# EAGLE board 10AxisFeatherWing (EAGLE 9.6.2)
REV: B
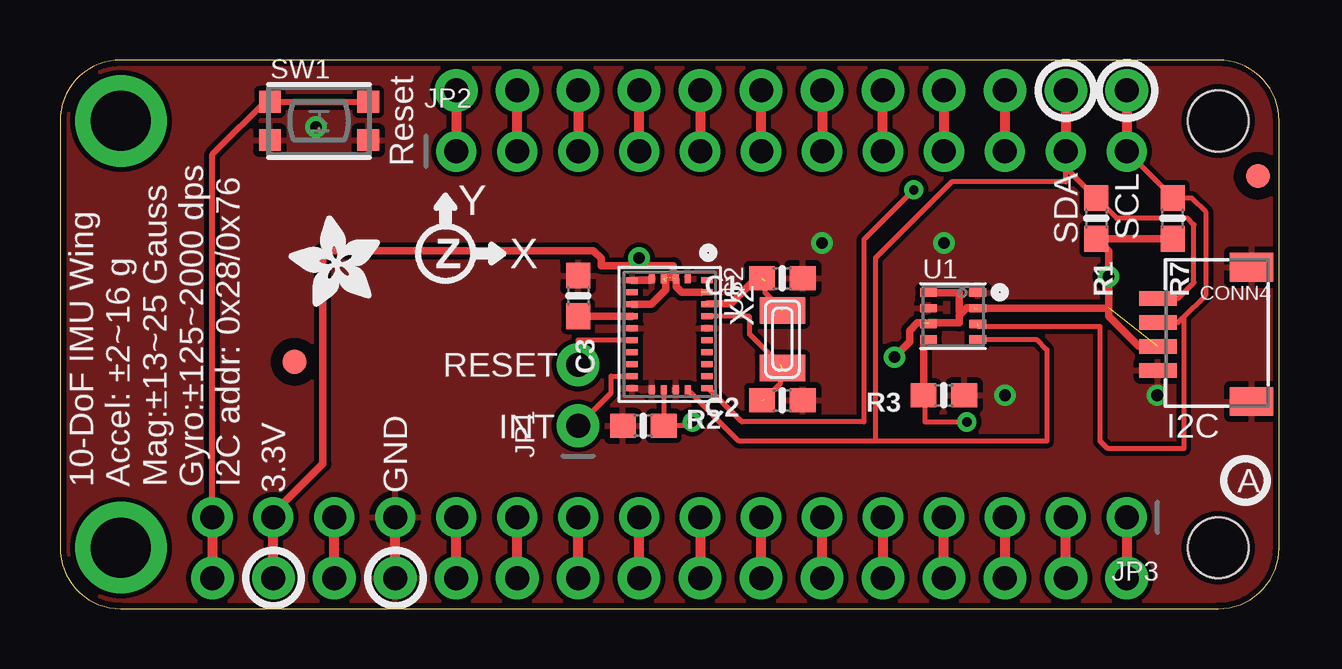
[diagram p0: board, top side]
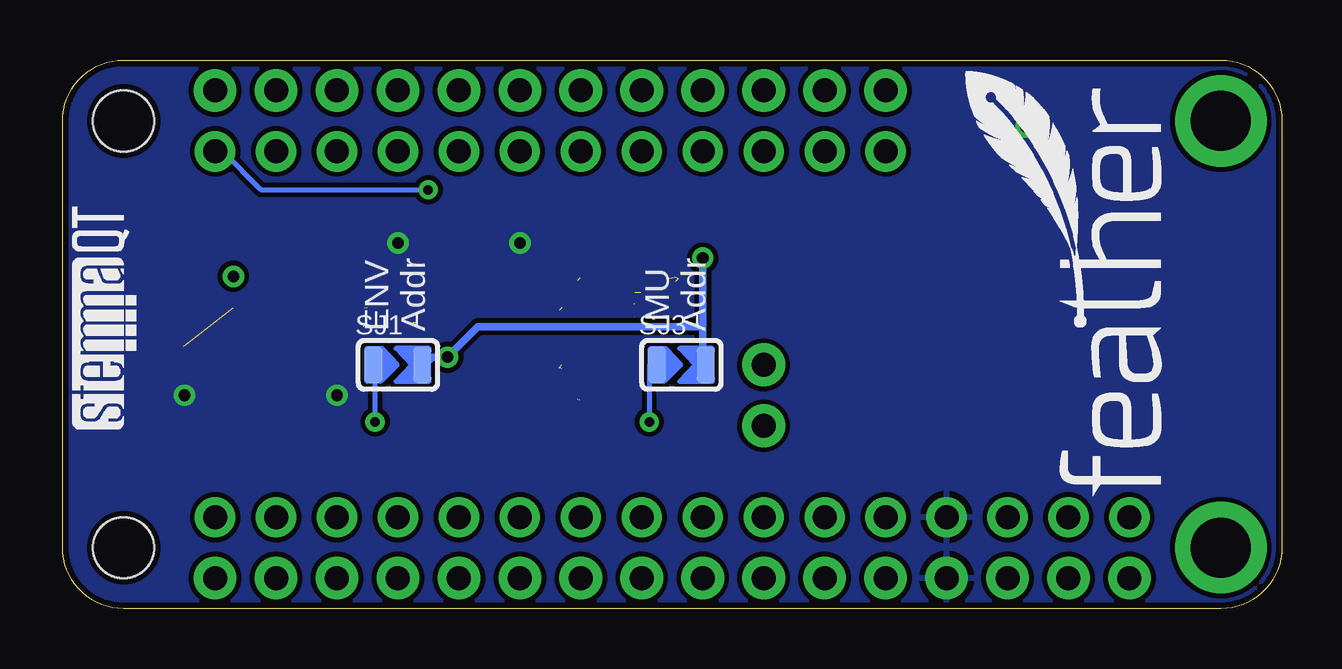
[diagram p1: board, bottom side, seen from below]

Size 50.8 x 22.86 mm. Coordinates in mm from the lower left corner, seen from the top.
Copper layers (1*16): Top 0.035mm / dielectric 1.5mm / Bottom 0.035mm
Design rules "adafruit *": minimum track width 8mil, minimum drill 15.5mil, track to track 8mil, track to pad 8mil, pad to pad 8mil, via to via 8mil, smd to smd 8mil, copper to edge 10mil, drill to drill 8mil, minimum pad ring 10mil, minimum via ring 8mil, stop-mask expansion 2mil, vias tented up to drill 20mil, thermal gap 10mil
Net classes: 1 highpower: width 0.406 mm, drill 0.483 mm; 2 lowpower: width 0.305 mm, drill 0.483 mm

## Footprints (pad centres in the part's own frame; a part is rotated, then mirrored left to right if it is on the bottom)
0603-NO = smd 1.075 x 1: 1 -0.85,0; 2 0.85,0
JST_SH4 = smd 0.6 x 1.55: 1 -1.5,2.514; 2 -0.5,2.514; 3 0.5,2.514; 4 1.5,2.514 | smd 1.2 x 1.8: MT1 -2.8,-1.386; MT2 2.8,-1.386
FIDUCIAL_1MM = smd 1 x 1: 1 0,0
1X02_ROUND = drill 1 pad 1.778: 1 -1.27,0; 2 1.27,0
1X12_ROUND = drill 1 pad 1.676: 1 -13.97,0; 2 -11.43,0; 3 -8.89,0; 4 -6.35,0; 5 -3.81,0; 6 -1.27,0; 7 1.27,0; 8 3.81,0; 9 6.35,0; 10 8.89,0; 11 11.43,0; 12 13.97,0
1X16_ROUND = drill 1 pad 1.676: 1 -19.05,0; 2 -16.51,0; 3 -13.97,0; 4 -11.43,0; 5 -8.89,0; 6 -6.35,0; 7 -3.81,0; 8 -1.27,0; 9 1.27,0; 10 3.81,0; 11 6.35,0; 12 8.89,0; 13 11.43,0; 14 13.97,0; 15 16.51,0; 16 19.05,0
FEATHERWING = drill 1 pad 1.778: 1 6.35,1.27; 2 8.89,1.27; 3 11.43,1.27; 4 13.97,1.27; 5 16.51,1.27; 6 19.05,1.27; 7 21.59,1.27; 8 24.13,1.27; 9 26.67,1.27; 10 29.21,1.27; 11 31.75,1.27; 12 34.29,1.27; 13 36.83,1.27; 14 39.37,1.27; 15 41.91,1.27; 16 44.45,1.27; 17 44.45,21.59; 18 41.91,21.59; 19 39.37,21.59; 20 36.83,21.59; 21 34.29,21.59; 22 31.75,21.59; 23 29.21,21.59; 24 26.67,21.59; 25 24.13,21.59; 26 21.59,21.59; 27 19.05,21.59; 28 16.51,21.59 | drill 2.5 pad 3.81: P$1 2.54,20.32; P$2 2.54,2.54 | hole 2.54: 48.26,20.32; 48.26,2.54
SOLDERJUMPER_ARROW_NOPASTE = smd 0.762 x 1.524: 1 -1.016,0; 2 1.016,0
BTN_KMR2_4.6X2.8 = smd 0.9 x 0.9: A 2.05,0.8; A' -2.05,0.8; B 2.05,-0.8; B' -2.05,-0.8
BME280 = smd 0.7 x 0.35: 1 1.025,0.975; 2 1.025,0.325; 3 1.025,-0.325; 4 1.025,-0.975; 5 -1.025,-0.975; 6 -1.025,-0.325; 7 -1.025,0.325; 8 -1.025,0.975
BNO055 = smd 0.25 x 0.475: 1 -2.25,1.562; 6 -2.25,-1.562; 7 -1.75,-1.562; 8 -1.25,-1.562; 9 -0.75,-1.562; 10 -0.25,-1.562; 11 0.25,-1.562; 12 0.75,-1.562; 13 1.25,-1.562; 14 1.75,-1.562; 15 2.25,-1.562; 20 2.25,1.562; 21 1.75,1.562; 22 1.25,1.562; 23 0.75,1.562; 24 0.25,1.562; 25 -0.25,1.562; 26 -0.75,1.562; 27 -1.25,1.562; 28 -1.75,1.562 | smd 0.375 x 0.25: 2 -2.312,0.75; 3 -2.312,0.25; 4 -2.312,-0.25; 5 -2.312,-0.75; 16 2.312,-0.75; 17 2.312,-0.25; 18 2.312,0.25; 19 2.312,0.75
XTAL3215 = smd 1.1 x 1.9: P$1 1.2,0; P$2 -1.2,0

## Placement (x,y rotation side)
C1  22pF  [0603-NO]  30.1,13.77 180 top
C2  22pF  [0603-NO]  30.1,8.69 180 top
C3  0.1uF  [0603-NO]  21.59,13.03 270 top
CONN4  STEMMA_I2C_QT  [JST_SH4]  48.26,11.43 90 top
FID1  FIDUCIAL_1MM  [FIDUCIAL_1MM]  9.78,10.29 0 top
FID2  FIDUCIAL_1MM  [FIDUCIAL_1MM]  49.91,18.03 0 top
JP1  [1X02_ROUND]  21.59,8.89 90 top
JP2  [1X12_ROUND]  30.48,19.05 0 top
JP3  [1X16_ROUND]  25.4,3.81 180 top
MS1  FEATHERWING  [FEATHERWING]  0,0 0 top
R1  10K  [0603-NO]  43.18,16.26 270 top
R2  10K  [0603-NO]  24.31,7.62 0 top
R3  10K  [0603-NO]  36.83,8.89 180 top
R7  10K  [0603-NO]  46.35,16.26 270 top
SJ1  [SOLDERJUMPER_ARROW_NOPASTE]  36.83,10.16 0 bottom
SJ3  [SOLDERJUMPER_ARROW_NOPASTE]  25.02,10.16 0 bottom
SW1  KMR2  [BTN_KMR2_4.6X2.8]  10.79,20.32 0 top
U1  BME280  [BME280]  37.21,12.19 0 top
U$2  BNO055  [BNO055]  25.4,11.43 270 top
U$13  [FEATHERLOGO_MED]  4.95,4.57 90 bottom
U$31  [STEMMAQT]  47.75,7.49 90 bottom
U$50  [ADAFRUIT_3.5MM]  13.34,12.57 90 top
U$51  [PCBFEAT-REV-040]  49.4,5.33 0 top
X2  32.768  [XTAL3215]  30.1,11.23 270 top

## Library data of the parts
C1-C3 CONN4 JP1-JP3 MS1 R1-R3 R7 SW1 U1 U$2 U$50 = microbuilder
FID1 FID2 SJ1 SJ3 = microbuilder; BOM: EXCLUDE
U$13 = feather_silks
U$31 = silks
U$51 = microbuilder; REV: A
X2 = adafruit2

## Nets
3.3V [lowpower]: CONN4.2 JP3.15 MS1.2 R1.2 R7.2 SJ1.2 SJ3.2 U1.2 U1.6 U1.8 U$2.3 U$2.4 U$2.8 U$2.28
A: JP3.12 MS1.5
AREF: JP3.14 MS1.3
B: JP3.11 MS1.6
C: JP3.10 MS1.7
D: JP3.9 MS1.8
E: JP3.8 MS1.9
EN: JP2.2 MS1.27
ENVADR_3V: R3.2 SJ1.1 U1.5
F: JP3.7 MS1.10
G: JP3.1 MS1.16
GND [lowpower]: C1.1 C2.1 C3.1 CONN4.1 CONN4.MT1 CONN4.MT2 JP3.13 MS1.4 R2.1 R3.1 SW1.B SW1.B' U1.1 U1.7 U$2.2 U$2.5 U$2.6 U$2.10 U$2.15 U$2.16 U$2.18 U$2.25
H: JP2.10 MS1.19
I: JP2.9 MS1.20
IMUADR_3V: R2.2 SJ3.1 U$2.17
INT_3V: JP1.1 U$2.14
J: JP2.8 MS1.21
K: JP2.7 MS1.22
L: JP2.6 MS1.23
M: JP2.5 MS1.24
MISO: JP3.4 MS1.13
MOSI: JP3.5 MS1.12
N: JP2.4 MS1.25
N$1: C1.2 U$2.27 X2.P$2
N$2: C2.2 U$2.26 X2.P$1
N$3: C3.2 U$2.9
NRESET_3V: JP1.2 U$2.11
RESET: JP3.16 MS1.1 SW1.A SW1.A'
RX: JP3.3 MS1.14
SCK: JP3.6 MS1.11
SCL: CONN4.4 JP2.11 MS1.18 R1.1 U1.4 U$2.19
SDA: CONN4.3 JP2.12 MS1.17 R7.1 U1.3 U$2.20
TX: JP3.2 MS1.15
USB: JP2.3 MS1.26
VBAT: JP2.1 MS1.28

## Tracks (layer width: path | path; a pad name or v marks a point on that pad's centre or on a via)
3.3V  (via drill 0.48)  (9 unrouted)
  Top 0.305: R7.2 R1.2 43.69,14.9 v43.69,13.84 43.69,12.54 | CONN4.2 44.95,10.93 43.69,12.19 43.69,12.52 U1.2 | 36.2,11.91 37.47,11.91 37.47,12.22 37.54,12.3 | 37.54,12.3 37.78,12.54 38.1,12.54 | U1.8 37.47,13.17 37.47,12.38 37.54,12.3 | v34.77,10.48 35.4,11.11 35.4,11.59 35.72,11.91 36.04,11.91 | 25.56,13.81 25.29,13.81 | 25.56,13.81 25.56,14.29 24.13,14.29 | 24.13,14.29 22.54,14.29 22.54,14.61 22.23,14.92 10.95,14.92 10.95,6.03 8.89,3.97 JP3.15 | 24.13,14.29 v24.13,14.61 | 25.56,13.81 25.67,13.7 25.67,13.41 25.9,13.18 26.71,13.18 | 26.71,13.18 | U$2.8 24.65,12.68 25.25,13.28 25.25,13.65
  Top 0.406: MS1.2 JP3.15
  Bottom 0.305: SJ1.2 35.72,10.16 35.4,10.48 v34.77,10.48 33.5,11.75 24.13,11.75 | v24.13,14.61 24.13,11.75 | 24.13,11.75 24.13,10.16 SJ3.2
A
  Top 0.406: MS1.5 JP3.12
AREF
  Top 0.406: MS1.3 JP3.14
B
  Top 0.406: MS1.6 JP3.11
C
  Top 0.406: MS1.7 JP3.10
D
  Top 0.406: MS1.8 JP3.9
E
  Top 0.406: JP3.8 MS1.9
EN
  Top 0.406: JP2.2 MS1.27
ENVADR_3V  (via drill 0.39)
  Top 0.203: v37.78,7.78 36.04,7.78 36.04,8.89 R3.2
  Top 0.305: R3.2 35.98,11.01 U1.5
  Bottom 0.203: v37.78,7.78 37.78,10.16 SJ1.1
F
  Top 0.406: MS1.10 JP3.7
G
  Top 0.406: JP3.1 MS1.16
GND  (via drill 0.48)
  Top 0.305: U$2.5 24.59,13.68 U$2.6
  Top 0.406: MS1.4 JP3.13
  other vias: 10.67,20.07 31.75,15.24 36.83,15.24 39.37,8.89 45.72,8.89
  pour Top: 0,22.86 50.8,22.86 50.8,0 0,0
  pour Bottom: 0,22.86 50.8,22.86 50.8,0 0,0
H
  Top 0.406: MS1.19 JP2.10
I
  Top 0.406: MS1.20 JP2.9
IMUADR_3V  (via drill 0.39)
  Top 0.203: U$2.17 R2.2 26.35,7.62 v26.35,7.78
  Bottom 0.203: v26.35,7.78 26.35,10.16 SJ3.1
INT_3V
  Top 0.203: JP1.1 22.96,8.99 22.96,9.68 23.44,9.68 23.46,9.68 U$2.14
J
  Top 0.406: JP2.8 MS1.21
K
  Top 0.406: MS1.22 JP2.7
L
  Top 0.406: JP2.6 MS1.23
M
  Top 0.406: MS1.24 JP2.5
MISO
  Top 0.406: MS1.13 JP3.4
MOSI
  Top 0.406: JP3.5 MS1.12
N
  Top 0.406: JP2.4 MS1.25
N$1  (3 unrouted)
  Top 0.203: 30,12.54 29.37,13.18 29.37,13.65
  Top 0.305: C1.2 29.01,13.77 27.94,12.7 26.98,12.7
N$2  (4 unrouted)
  Top 0.203: U$2.26 28.73,12.18 28.73,11.43 30,10.16 | 29.37,8.73 30,9.37 30,10
N$3
  Top 0.203: 21.79,12.38 C3.2
  Top 0.305: U$2.9 21.99,12.18 21.79,12.38
NRESET_3V
  Top 0.203: U$2.11 21.59,11.18 JP1.2
RESET
  Top 0.254: JP3.16 6.35,18.92 8.74,21.32 SW1.A' SW1.A
  Top 0.406: JP3.16 MS1.1
RX
  Top 0.406: JP3.3 MS1.14
SCK
  Top 0.406: MS1.11 JP3.6
SCL
  Top 0.203: CONN4.4 46.59,12.93 47.24,13.59 47.24,16 46.99,16.26 44.03,16.26 R1.1 41.91,18.38 JP2.11 41.91,17.78 37.15,17.78 33.97,14.61 33.97,6.99 | 33.97,6.99 41.12,6.99 41.12,10.79 40.69,11.22 U1.4 | 33.97,6.99 28.28,6.99 U$2.19
  Top 0.406: MS1.18 JP2.11
SDA  (via drill 0.39)  (1 unrouted)
  Top 0.203: JP2.12 46.35,17.14 R7.1 47.16,17.11 47.75,16.51 47.75,13.08 46.78,12.11 | CONN4.3 46.6,11.93 46.78,12.11 | v35.57,17.45 33.5,15.37 33.5,7.78 28.42,7.78 27.02,9.18 U$2.20 | 38.26,11.75 43.34,11.75 43.34,6.99 43.66,6.67 46.83,6.67 46.83,12.06 46.78,12.11
  Top 0.406: MS1.17 JP2.12
  Bottom 0.203: v35.57,17.45 35.59,17.46 42.55,17.46 44.13,19.05 JP2.12
TX
  Top 0.406: MS1.15 JP3.2
USB
  Top 0.406: MS1.26 JP2.3
VBAT
  Top 0.406: MS1.28 JP2.1

## Text on the board
tPlace: Reset | Y | SDA | SCL | Z | X | RESET | INT | I2C | 10-DoF IMU Wing / Accel: ±2~16 g / Mag:±13~25 Gauss / Gyro:±125~2000 dps / I2C addr: 0x28/0x76 | 3.3V | GND
bPlace: IMU / Addr | ENV / Addr